# Altium PCB Digitalización_SeñalEMG.PcbDoc
Units mil, origin at the board's own origin, x right, y up, seen from the top; angles counter-clockwise.
Board outline 3055 x 1280 mil, 2 copper layers (Top Layer, Bottom Layer); 15 components, 18 nets, 59 pads, 7 vias.
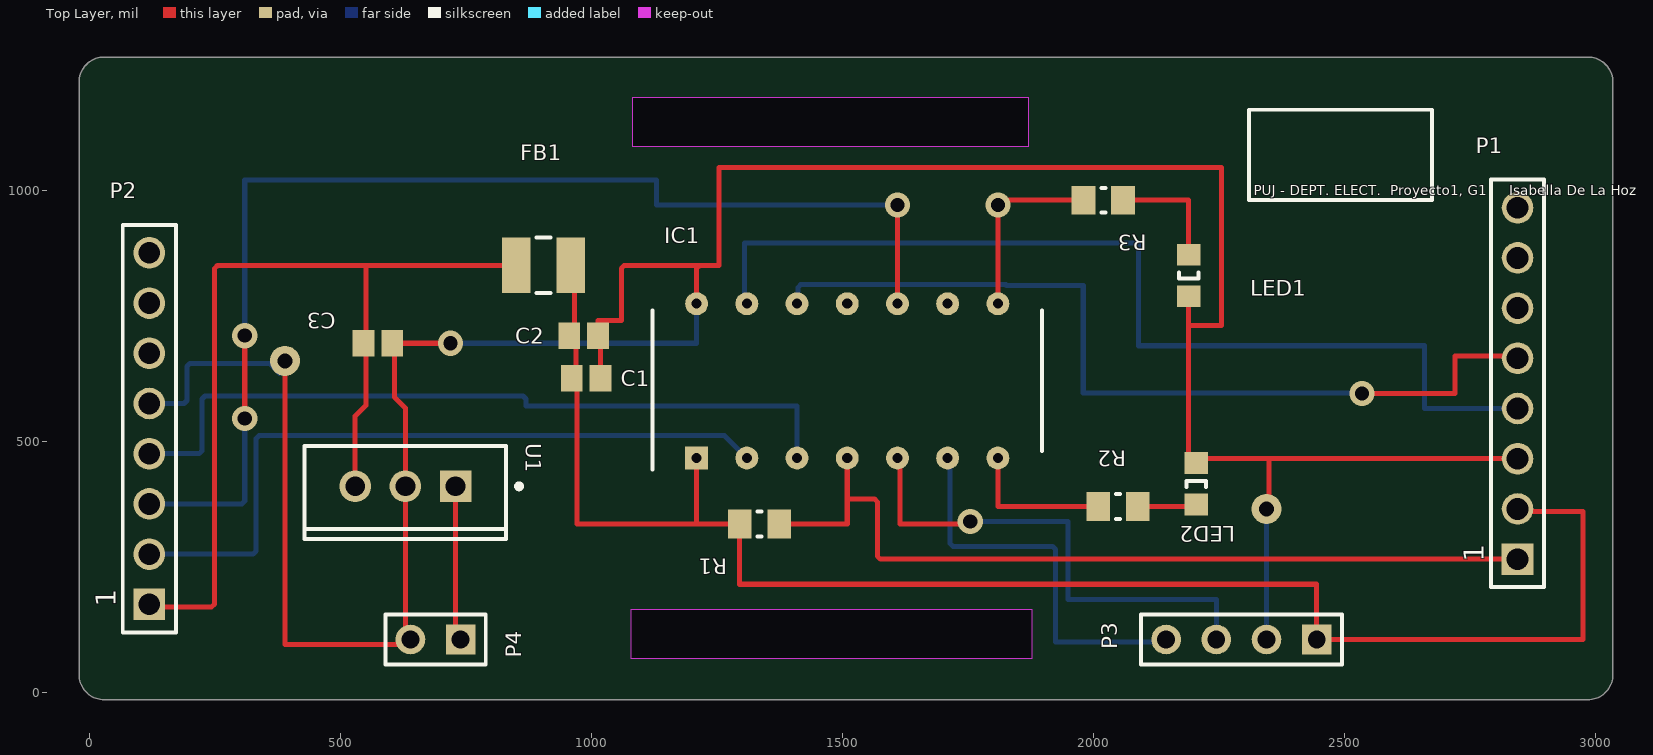
[diagram p0: Top Layer view]
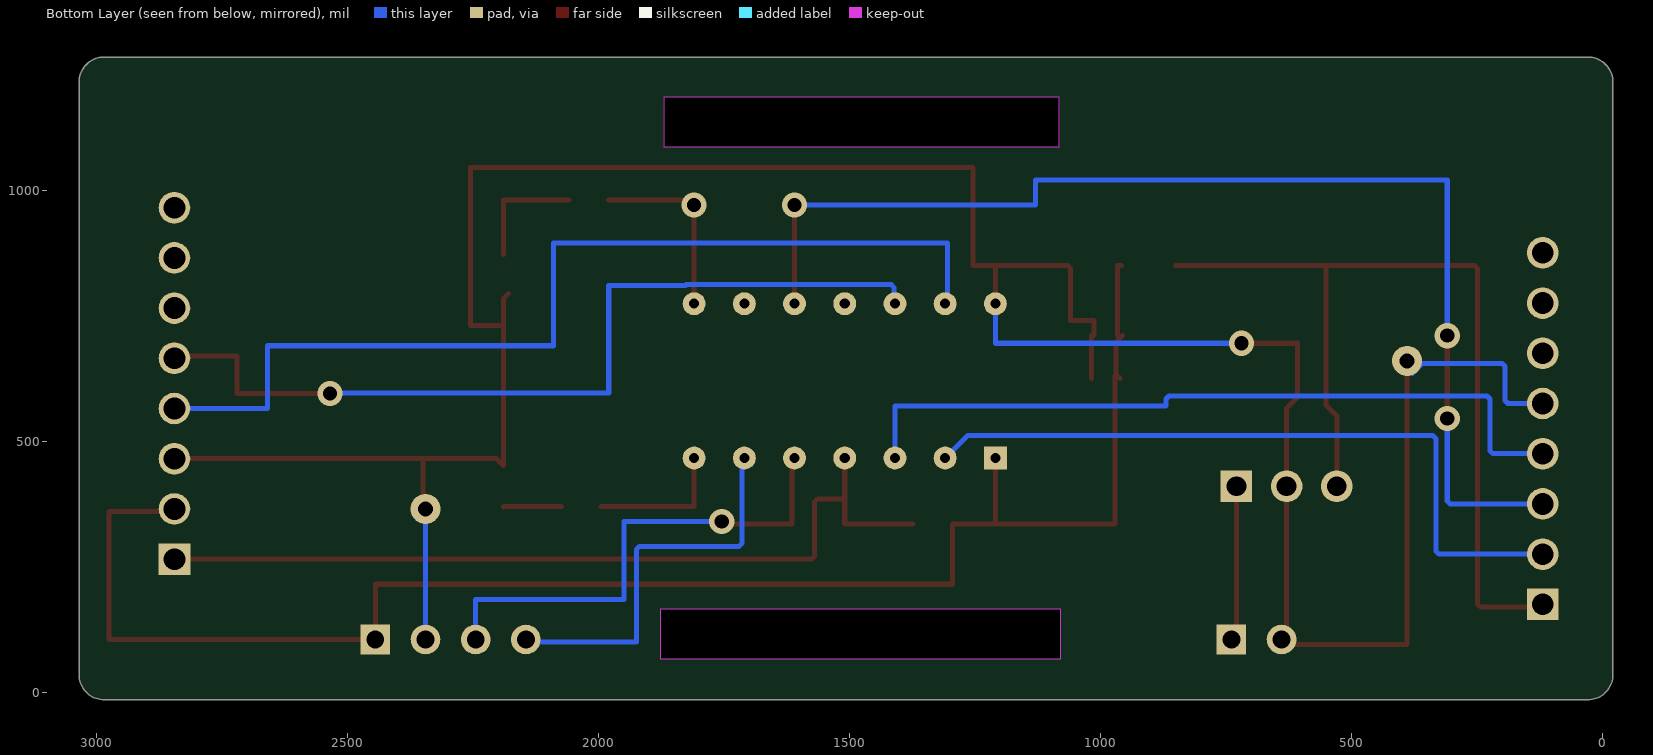
[diagram p1: Bottom Layer view, seen from below]
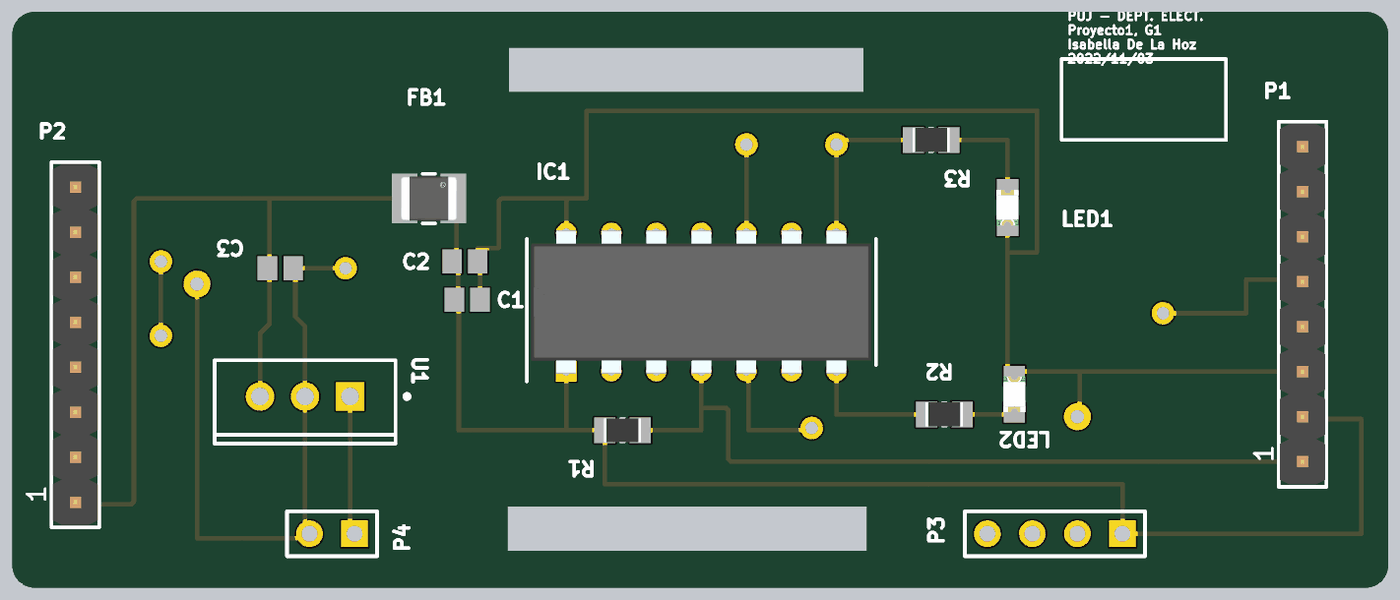
[diagram p2: 3D render of the assembled board from above, using the file's embedded part models]

## Layer stack, top to bottom
Top Solder: solder mask 0.4, Solder Resist, Dk 3.5
Top Layer: signal copper 1.4
Dielectric 1: dielectric 12.6, FR-4, Dk 4.8
Bottom Layer: signal copper 1.4
Bottom Solder: solder mask 0.4, Solder Resist, Dk 3.5

## Board outline
-20,35 -20,1215 cw(c30,1215) 30,1265 2985,1265 cw(c2985,1215) 3035,1215 3035,35 cw(c2985,35) 2985,-15 30,-15 cw(c30,35)
cut-out: 1080,66.57 1080,165 1877.4,165 1877.4,66.57
cut-out: 1082.6,1086.57 1082.6,1185 1870,1185 1870,1086.57

## Design rules (kind name [scope] priority, off if disabled: settings)
Clearance [All] p1: gap=10 ignorepadtopadclearanceinfootprint=FALSE except(0: Arc-Hole Track-Hole SMDPad-Hole THPad-Hole Via-Hole Fill-Hole Poly-Hole Region-Hole Text-Hole)
PolygonConnect [All] p1: connectstyle=Relief reliefconductorwidth=10 reliefentries=4 polygonreliefangle="90 Angle" airgapwidth=10
RoutingVias [All] p1: holewidth=28 width=50 viastyle="Through Hole" minholewidth=28 minwidth=50 maxholewidth=28 maxwidth=50
SolderMaskExpansion [All] p1: expansion=4 istentingtop=FALSE
Width [All] p1: maxlimit=10 minlimit=10 preferedwidth=10
30 further rules are at their usual default settings.

## Components (designator, comment, footprint, x,y, rotation, side; value= is the part's Value field where it differs from the comment)
C1 "VJ0805Y103JXBMT" CAPC2013X145X48LL20T23 990,625 r0 top
C2 "VJ0805Y103JXBMT" CAPC2013X145X48LL20T23 985,710 r0 top
C3 "VJ0805Y103JXBMT" CAPC2013X145X48LL20T23 575,695 r180 top
FB1 "FBMH3225HM102NT" FP-FBMH3225-IPC_B 905,850 r0 top
IC1 "PIC16F18426-E_P" DIP781W56P254L1918H533Q14N 1510,620 r90 top
LED1 "150080BS75000" 0805_A 2190,830 r90 top
LED2 "150080BS75000" 0805_A 2205,415 r270 top
P1 "61300811121" 61300811121 2845,615 r90 top
P2 "61300811121" 61300811121 120,525 r90 top
P3 "Serial" HDR1X4 2445,105 r180 top
P4 "BAT" HDR1X2 740,105 r180 top
R1 "RC0805JR-070RL" RESC2013X60X35ML10T20 1335,335 r180 top
R2 "RC0805JR-070RL" RESC2013X60X35ML10T20 2049.37,370 r180 top
R3 "RC0805JR-070RL" RESC2013X60X35ML10T20 2020,980 r180 top
U1 "LM7805CT" FAIR-TO-220-3 630,410 r270 top

## Footprints (in the part's own frame and the unit in brackets; to place one, negate y for a bottom-side part, rotate by r counter-clockwise, add the part's x,y. Pads: shape width x height; smd on the part's side, far side on the other; paste and mask are expansions set on the pad)
0805_A [mm] "Chip LED, 2-Leads, Body 2.0x1.3mm, IPC Medium Density"
  rect 1.1x1.2 smd: 1(-1.05,0) 2(1.05,0)
  silkscreen extent -0.15,-0.5 0.15,0.5, body extent -1,-0.62 1,0.63, height 0.68
61300811121 [mm] "Pin Header, pitch 2.54 mm, THT, Vertical, single row, 8p"
  rect 1.6x1.6 hole 1.1: 1(-8.89,0)
  round 1.6 hole 1.1: 2(-6.35,0) 3(-3.81,0) 4(-1.27,0) 5(1.27,0) 6(3.81,0) 7(6.35,0) 8(8.89,0)
  silkscreen extent -10.31,-1.35 10.31,1.35, body extent -10.16,-1.27 10.16,1.27, height 8.57
CAPC2013X145X48LL20T23 [mm] "Chip Capacitor, 2-Leads, Body 2.00x1.25mm, IPC High Density"
  rect 1.1x1.35 smd: 1(-0.725,0) 2(0.725,0)
  body extent -1.1,-0.72 1.1,0.72, height 1.45
DIP781W56P254L1918H533Q14N [mil]
  rect 45.63x45.63 hole 20: 1(-153.74,300)
  round 45.63 hole 20: 2(-153.74,200) 3(-153.74,100) 4(-153.74,0) 5(-153.74,-100) 6(-153.74,-200) 7(-153.74,-300) 8(153.74,-300) 9(153.74,-200) 10(153.74,-100) 11(153.74,0) 12(153.74,100) 13(153.74,200) 14(153.74,300)
  silkscreen extent -177,-387 140,387, body extent -159,-378 159,378, height 210
FAIR-TO-220-3 [mm] "FM, 3-Leads, Body 10.2x4.7mm, Pitch 2.54mm"
  rect 1.6x1.6 hole 1: 1(0,2.54)
  round 1.6 hole 1: 2(0,0) 3(0,-2.54)
  silkscreen extent -2.04,-5.1 2.66,5.88, body extent -2.04,-5.1 2.66,5.1, height 18.95
FP-FBMH3225-IPC_B [mil]
  rect 57.22x110.4 smd paste+0 mask+0: 1(-54.15,0) 2(54.15,0)
  silkscreen extent -14,-55 14,55, body extent -93,-65 93,65, height 10
HDR1X2 [mm] "Connector; Header; 2 Position"
  rect 1.5x1.5 hole 0.9: 1(0,0)
  round 1.5 hole 0.9: 2(2.54,0)
  silkscreen extent -1.27,-1.27 3.81,1.27
HDR1X4 [mm] "Connector; Header; 4 Position"
  rect 1.5x1.5 hole 0.9: 1(0,0)
  round 1.5 hole 0.9: 2(2.54,0) 3(5.08,0) 4(7.62,0)
  silkscreen extent -1.27,-1.27 8.89,1.27
RESC2013X60X35ML10T20 [mm] "Chip Resistor, 2-Leads, Body 2.1x1.35mm, IPC Low Density"
  rect 1.2x1.45 smd: 1(-1,0) 2(1,0)
  silkscreen extent -0.1,-0.63 0.1,0.63, body extent -1.05,-0.68 1.05,0.67, height 0.6

## Part data
C1 C2 C3: library part CMP-2007-01883-1, Manufacturer=Vitramon, Part Number=VJ0805Y103JXBMT
FB1: library part CMP-2000-06239-3, "FERRITE BEAD 1 KOHM 1210 1LN", Case Code (Imperial)=1210, Case Code (Metric)=3225, Current Rating=2A, DC Resistance (DCR)=100mR, Frequency=100MHz, Max Operating Temperature=125°C, Min Operating Temperature=-40°C, Package Quantity=1, Resistor Type="Ferrite Bead", Tolerance=30%, Case/Package=1210, Core Material=Ferrite, Depth=2.8mm, Halogen Free="Halogen Free", Height=2.8mm, Impedance=1kR, Lead Free="Lead Free", Length=3.2mm, Material=Ferrite, Max Current Rating=2A, Max DC Current=2A, Mount="Surface Mount", Number of Lines=1, Number of Pins=2, Packaging="Tape and Reel", Resistance=100mR, RoHS Compliant=Yes, Series=FB, Shielding=Unshielded, Termination=SMD/SMT, Test Frequency=100MHz, Width=0.098inch
IC1: "Integrated Circuit", Arrow Part Number=PIC16F18426-E/P, Manufacturer_Name=Microchip, Mouser Part Number=579-PIC16F18426-E/P, Arrow Price/Stock=https://www.arrow.com/en/products/pic16f18426-ep/microchip-technology?region=nac, Datasheet Link=http://ww1.microchip.com/downloads/en/DeviceDoc/Microchip-8-bit-PIC-MCU-PIC16(L)F18426_46-Datasheet-40001985A.pdf, Height=5.334mm, Manufacturer_Part_Number=PIC16F18426-E/P, Mouser Price/Stock=https://www.mouser.co.uk/ProductDetail/Microchip-Technology/PIC16F18426-E-P?qs=rrS6PyfT74dRYO4qd7TFuw%3D%3D
LED1 LED2: library part CMP-1426-00008-1, "SMD mono-color Chip LED, WL-SMCW, Blue", Color=Blue, Manufacturer="Wuerth Elektronik", ComponentLink1Description="Manufacturer URL", ComponentLink1URL=http://www.we-online.com, ComponentLink2Description=Datasheet, ComponentLink2URL=http://katalog.we-online.com/led/datasheet/150080BS75000.pdf, PackageReference=0805_A, PartNumber=150080BS75000
P1 P2: library part CMP-1502-01076-1, "THT Vertical Pin Header WR-PHD, Pitch 2.54 mm, Single Row, 8 pins", Contact Resistance=20mOhm, Manufacturer="Wurth Elektronik", Operating temperature=-40to105degC, Rated Current=3A, Withstanding Voltage=500VAC, Working Voltage=250VAC, Datasheet URL=https://katalog.we-online.de/em/datasheet/6130xx11121.pdf, Gender=Male, Manufacturer URL=http://www.we-online.de, Mounting Technology=THT, Orientation=Vertical, Package Reference=61300811121, Packaging=Bag, Part Number=61300811121, Pin Number=8, Pitch=2.54mm, Publisher=WurthElektronik, Row Number=Single
P3: library part "Header 4", "Header, 4-Pin", Supplier Part Number 1=A1922-ND, LatestRevisionDate=17-Jul-2002, LatestRevisionNote="Re-released for DXP Platform.", Publisher="Altium Limited", Supplier 1=Digi-Key
P4: library part "Header 2", "Header, 2-Pin", Supplier Part Number 1=WM4111-ND, LatestRevisionDate=17-Jul-2002, LatestRevisionNote="Re-released for DXP Platform.", Publisher="Altium Limited", Supplier 1=Digi-Key
R1 R2 R3: library part CMP-2100-03673-1, "Chip Resistor, 0 Ohm, Jumper, +/- 5%, 0.125 W, -55 to 155 degC, 0805 (2012 Metric), RoHS, Tape and Reel", Case Code (Imperial)=0805, Case Code (Metric)=2012, Manufacturer=Yageo, Max Operating Temperature=155degC, Min Operating Temperature=-55degC, Package Description="2-Pin Surface Mounted Device, Body 2 x 1.25 mm", Power Rating=125mW, Resistance=0mOhm, Temperature Coefficient=200ppm/degreesC, Tolerance=5%, Voltage Rating=150V, Case/Package=0805, Composition=ThickFilm, Contact Plating=Tin, Datasheet URL=http://www.yageo.com/NewPortal/yageodocoutput?fileName=/pdf/R-Chip/PYu-RC_Group_51_RoHS_L_5.pdf, Datasheet Version="Rev. 5, 10/2016", Depth=1.25mm, Height=0.5mm, Lead Free=LeadFree, Length=2mm, Manufacturer URL=http://www.yageo.com/, Military Standard=Not, Number of Pins=2, Package Reference=0805, Packaging=TapeandReel, Radiation Hardening=No, REACH SVHC=Unknown, RoHSCompliant=true, Termination=SMD/SMT, Voltage Rating (DC)=150V, Width=1.25mm
U1: library part CMP-2000-04938-1, "Positive Voltage Regulator, 5 V, 1 A, -40 to 125 degC, 3-Pin TO-220, RoHS, Tube", Manufacturer=FairchildSemiconductor, Maximum Input Voltage=35V, Maximum Output Current=2.2(Typ)A, Maximum Quiescent Current=8mA, Operating temperature=-40to125degC, Output Voltage=5V, Package=3TO-220AB, Package Description="3-Pin Through Hole Device, Body 10 x 4.5 mm, Pitch 2.54 mm", Package Reference=TO-220, Typical Dropout Voltage @ Current=2@1AV, Accuracy=±4%, Category=LinearRegulator, Datasheet URL=https://datasheet.ciiva.com/26904/lm7805ct-26904988.pdf, Datasheet Version=Aug-12, Line Regulation=100mV, Load Regulation=100mV, Manufacturer URL=https://www.fairchildsemi.com/, Mounting=ThroughHole, Number of Outputs=1, Output Type=Fixed, Package URL=https://www.fairchildsemi.com/package-drawings/TO/TO220B03.pdf, Packaging=Rail/Tube, Polarity=Positive, Rad Hard=No, Type=Linear

## Free pads (board coordinates)
  round 60 hole 30: 15(2345,365) 16(390,660)

## Via types
v1: diameter 50, hole 28, Top Layer to Bottom Layer, 7 vias

## Nets (pads, with @x,y where several pads share a name; then routed paths per layer and width w, separated by ;. In a path a pad name is that pad's centre, name@x,y a point inside that pad or via, vN(x,y) a via of type N, cw(c..) or ccw(c..) an arc to the next point about the centre after c; other vN are vias at no path point)
+VD: C1.1 C2.1 FB1.2 IC1.1 P1.2 P3.1 R1.2 | length 3267.6
  Top Layer w10: C2.1 970,696.46 970,633.54 C1.1 ; FB1.2 966.46,850 C2.1@966.46,710 ; C1.1@971.46,629.27 971.46,335 1210,335 ; IC1.1 1210,335 ; P3.1 2975,105 2975,360 2850,360 P1.2 ; P3.1@2445,125 2445,215 1295.63,215 R1.2 1210,335
GND: C1.2 C2.2 C3.1 IC1.14 LED1.1 LED2.1 P1.3 P2.5 P3.2 P4.2 pad.15 pad.16 U1.2 | length 5960.6
  Top Layer w10: pad.16 390,95 640,95 P4.2 630,105 U1.2 630,565.63 608.54,587.09 608.54,695 v1(720,695) ; C1.2 1018.54,710 C2.2 1013.54,740 1060,740 1060,844.14 1065.86,850 1215.63,850 ; IC1.14 1210,844.37 1215.63,850 ; LED1.1@2180,793.66 2190,783.66 2190,730 ; pad.15 2350,365 2350,465 ; P1.3 2350,465 ; 1215.63,850 1255,850 1255,1045 2255,1045 2255,730 2190,730 ; 2190,730 2190,451.34 2203.66,465 2350,465
  Bottom Layer w10: P2.5 189.14,575 195,580.86 195,649.14 200.86,655 359.14,655 379.14,635 pad.16 ; v1(720,695) 1210,695 IC1.14 ; P3.2 pad.15@2345,350
NetIC1_2: IC1.2 P2.2 | length 1437.6
  Bottom Layer w10: P2.2 326.64,275 332.5,280.86 332.5,505.07 338.36,510.93 1265.33,510.93 IC1.2
NetIC1_3: IC1.3 P2.4 | length 1518.4
  Bottom Layer w10: P2.4 219.14,475 225,480.86 225,584.14 230.86,590 864.14,590 870,584.14 870,570 1410,570 IC1.3
NetIC1_4: IC1.4 P1.1 R1.1 | length 1715
  Top Layer w10: R1.1 1510,335 1510,385 ; IC1.4 1510,385 ; P1.1 1575.86,265 1570,270.86 1570,379.14 1564.14,385 1510,385
NetIC1_5: IC1.5 P3.3 | length 991.3
  Top Layer w10: IC1.5 1615,466.26 1615,335 v1@1745,335
  Bottom Layer w10: v1(1755,340) 1950,340 1950,185 2245,185 P3.3
NetIC1_6: IC1.6 P3.4 | length 799.4
  Bottom Layer w10: IC1.6 1715,466.26 1715,295.86 1720.86,290 1919.14,290 1925,284.14 1925,100 2145,100 P3.4
NetIC1_7: IC1.7 R2.2 | length 281.9
  Top Layer w10: IC1.7 1810,370 R2.2@1995.63,370
NetIC1_8: IC1.8 R3.2 | length 376.9
  Top Layer w10: IC1.8 v1(1810,970) 1810,980 R3.2
NetIC1_9: IC1.9
NetIC1_10: IC1.10 P2.3 | length 2372.8
  Top Layer w10: v1(310,545) v1(310,710) ; IC1.10 v1(1610,970)
  Bottom Layer w10: P2.3 304.14,375 310,380.86 v1(310,545) ; v1@310,715 310,1020 1130,1020 1130,970 v1(1610,970)
NetIC1_11: IC1.11
NetIC1_12: IC1.12 P1.5 | length 1748.3
  Top Layer w10: v1(2535,595) 2720,595 2720,670 2845,670 P1.5
  Bottom Layer w10: IC1.12 1411.52,775.26 1411.52,805.7 1417.38,811.56 1825.66,811.56 1827.22,810 1980,810 1980,595.86 v1@2520,595.86
NetIC1_13: IC1.13 P1.4 | length 1996.3
  Bottom Layer w10: IC1.13 1305,773.74 1305,895 2090,895 2090,690 2660,690 2660,565 P1.4
NetLED1_2: LED1.2 R3.1 | length 239.3
  Top Layer w10: R3.1 2190,980 LED1.2
NetLED2_2: LED2.2 R2.1 | length 117
  Top Layer w10: R2.1@2074.37,370 2190,370 LED2.2@2190,368.66
Vbat: P4.1 U1.1 | length 315
  Top Layer w10: U1.1 730,105 P4.1
VCC: C3.2 FB1.1 P2.1 U1.3 | length 1850.4
  Top Layer w10: P2.1@122.5,170 244.14,170 250,175.86 250,844.14 255.86,850 551.46,850 ; U1.3 530,550 551.46,571.46 551.46,850 ; FB1.1 551.46,850
pads on no net: P1.6 P1.7 P1.8 P2.6 P2.7 P2.8

## Silkscreen, mask and mechanical layers (free items; w line width, h text height)
Top Overlay:
  lines w7.87: 2310,980 2675,980 2675,1160 2310,1160 2310,980
  text "PUJ - DEPT. ELECT.  Proyecto1, G1     Isabella De La Hoz             2022/11/03" at 2320,990 h19.68
Mechanical 1:
  lines w10: -20,1215 cw(c30,1215) 30,1265 2982.76,1265 ; -20,1216.1 -20,35 ccw(c30,35) 30,-15 2982.76,-15 ; 2985,-15 ccw(c2985,35) 3035,35 3035,1216.1 ; 2985,1265 cw(c2985,1215) 3035,1215
Mechanical 13:
  lines w10: 1080,66.57 1877.4,66.57 1877.4,165 1080,165 1080,66.57 ; 1082.6,1086.57 1870,1086.57 1870,1185 1082.6,1185 1082.6,1086.57

## Text inside footprints (layer, text, board x,y; h text height)
P1: Top Overlay "1" at 2778.07,260.28 h40 r90
P2: Top Overlay "1" at 53.07,170.28 h40 r90